# EAGLE board source_eagle (EAGLE 9.6.2)
REV: B
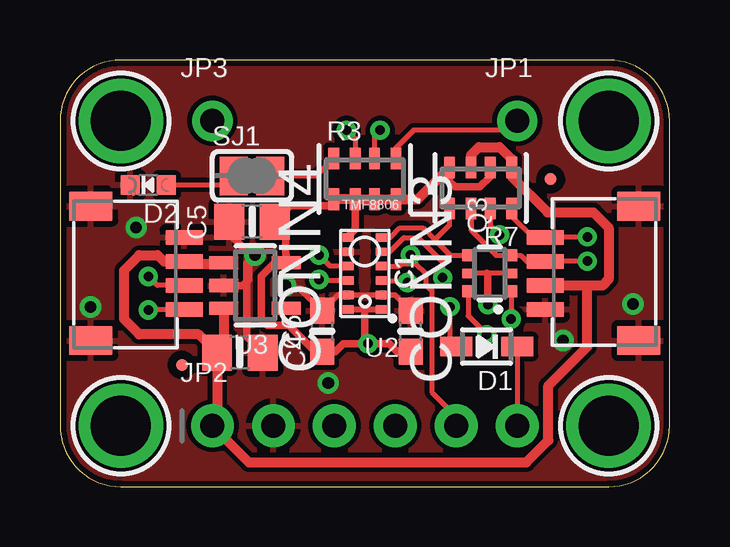
[diagram p0: board, top side]
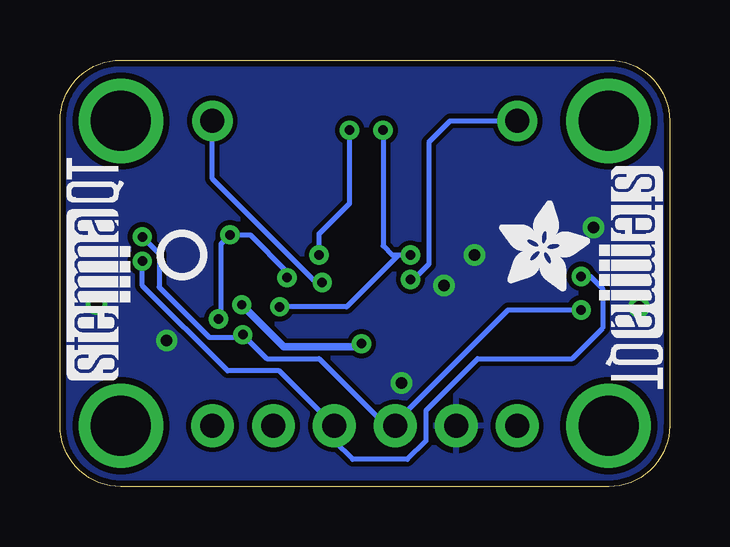
[diagram p1: board, bottom side, seen from below]

Size 25.4 x 17.78 mm. Coordinates in mm from the lower left corner, seen from the top.
Outline: 0,15.24 0,2.54 arc90 2.54,0 22.86,0 arc90 25.4,2.54 25.4,15.24 arc90 22.86,17.78 2.54,17.78 arc90 0,15.24
Copper layers (1*16): Top 0.035mm / dielectric 1.5mm / Bottom 0.035mm
Design rules "adafruit *": minimum track width 8mil, minimum drill 15.5mil, track to track 8mil, track to pad 8mil, pad to pad 8mil, via to via 8mil, smd to smd 8mil, copper to edge 10mil, drill to drill 8mil, minimum pad ring 10mil, minimum via ring 8mil, stop-mask expansion 2mil, vias tented up to drill 20mil, thermal gap 10mil
Net classes: 1 highpower: width 0.406 mm, drill 0.483 mm; 2 lowpower: width 0.305 mm, drill 0.483 mm

## Footprints (pad centres in the part's own frame; a part is rotated, then mirrored left to right if it is on the bottom)
0603-NO = smd 1.075 x 1: 1 -0.85,0; 2 0.85,0
0805-NO = smd 1.24 x 1.5: 1 -0.95,0; 2 0.95,0
JST_SH4 = smd 0.6 x 1.55: 1 -1.5,2.006; 2 -0.5,2.006; 3 0.5,2.006; 4 1.5,2.006 | smd 1.2 x 1.8: MT1 -2.8,-1.894; MT2 2.8,-1.894
SOD-323 = smd 1.35 x 0.8: A 1.27,0; C -1.27,0
CHIPLED_0603_NOOUTLINE = smd 0.8 x 0.8: A 0,-0.75; C 0,0.75
FIDUCIAL_0.5MM = smd 0.5 x 0.5: 1 0,0
1X01_ROUND = drill 1 pad 1.676: 1 0,0
1X06_ROUND_70 = drill 1 pad 1.778: 1 -6.35,0; 2 -3.81,0; 3 -1.27,0; 4 1.27,0; 5 3.81,0; 6 6.35,0
SOT363 = smd 0.5 x 0.5: 1 -0.75,-0.9; 3 0.75,-0.9; 4 0.75,0.9; 6 -0.75,0.9 | smd 0.4 x 0.5: 2 0,-0.9; 5 0,0.9
RESPACK_4X0603 = smd 0.45 x 0.9: 1 -1.3,-0.85; 2 -0.4,-0.85; 3 0.4,-0.85; 4 1.3,-0.85; 5 1.3,0.85; 6 0.4,0.85; 7 -0.4,0.85; 8 -1.3,0.85
SOLDERJUMPER_CLOSEDWIRE = smd 1.168 x 1.6: 1 -0.762,0; 2 0.762,0 | smd 0.635 x 0.203: WIRE 0,0
TMF880X = smd 0.575 x 0.35: 1 -0.738,1.5; 2 -0.738,0.9; 3 -0.738,0.3; 4 -0.738,-0.3; 5 -0.738,-0.9; 6 -0.738,-1.5; 7 0.738,-1.5; 8 0.738,-0.9; 9 0.738,-0.3; 10 0.738,0.3; 11 0.738,0.9; 12 0.738,1.5
SOT23-5 = smd 0.55 x 1.2: 1 -0.95,-1.3; 2 0,-1.3; 3 0.95,-1.3; 4 0.95,1.3; 5 -0.95,1.3
MOUNTINGHOLE_2.5_PLATED = drill 2.5 pad 3.2: P$1 0,0

## Placement (x,y rotation side)
C1  0.1uF  [0603-NO]  14.61,6.48 90 top
C4  10uF  [0805-NO]  7.49,5.59 0 top
C5  10uF  [0805-NO]  8,11.05 180 top
C6  0.1uF  [0603-NO]  10.92,6.48 90 top
CONN3  STEMMA_I2C_QT  [JST_SH4]  22.23,8.89 90 top
CONN4  STEMMA_I2C_QT  [JST_SH4]  3.17,8.89 270 top
D1  1N4148  [SOD-323]  17.78,5.84 180 top
D2  GREEN  [CHIPLED_0603_NOOUTLINE]  3.68,12.57 90 top
FID1  FIDUCIAL_0.5MM  [FIDUCIAL_0.5MM]  5.08,5.08 0 top
FID4  FIDUCIAL_0.5MM  [FIDUCIAL_0.5MM]  20.45,12.83 0 top
JP1  [1X01_ROUND]  19.05,15.24 0 top
JP2  [1X06_ROUND_70]  12.7,2.54 0 top
JP3  [1X01_ROUND]  6.35,15.24 0 top
PLABEL0  [PLABEL0]  6.35,0.89 0 top
PLABEL1  [PLABEL1]  8.89,4.19 0 top
PLABEL2  [PLABEL2]  11.43,0.89 0 top
PLABEL3  [PLABEL3]  13.97,4.19 0 top
PLABEL4  [PLABEL4]  16.64,0.89 0 top
PLABEL5  [PLABEL5]  19.05,4.19 0 top
PLABEL6  [PLABEL6]  12.57,16.64 0 top
PLABEL7  [PLABEL7]  12.57,14.99 0 top
PLABEL8  [PLABEL8]  0.38,12.45 0 top
PLABEL9  [PLABEL9]  6.35,16.89 0 top
PLABEL10  [PLABEL10]  19.18,16.89 0 top
PLABEL11  [PLABEL11]  12.7,16.26 0 bottom
PLABEL12  [PLABEL12]  12.7,12.32 0 bottom
PLABEL13  [PLABEL13]  12.7,6.86 0 bottom
PLABEL14  [PLABEL14]  12.7,1.02 0 bottom
Q3  BSS138  [SOT363]  17.91,8.89 90 top
R3  10K Pack  [RESPACK_4X0603]  12.7,12.83 0 top
R7  10K Pack  [RESPACK_4X0603]  17.53,12.45 180 top
SJ1  [SOLDERJUMPER_CLOSEDWIRE]  8,12.95 0 top
U2  TMF8806  [TMF880X]  12.7,8.89 180 top
U3  AP2112K-3.3  [SOT23-5]  8.13,8.38 270 top
U$30  MOUNTINGHOLE2.5  [MOUNTINGHOLE_2.5_PLATED]  2.54,15.24 0 top
U$31  MOUNTINGHOLE2.5  [MOUNTINGHOLE_2.5_PLATED]  22.86,15.24 0 top
U$33  MOUNTINGHOLE2.5  [MOUNTINGHOLE_2.5_PLATED]  2.54,2.54 0 top
U$34  MOUNTINGHOLE2.5  [MOUNTINGHOLE_2.5_PLATED]  22.86,2.54 0 top
U$36  [ADAFRUIT_3.5MM]  7.11,8.13 0 bottom
U$37  [PCBFEAT-REV-040]  20.32,9.65 0 bottom
U$38  [STEMMAQT]  22.48,4.45 90 bottom
U$39  [STEMMAQT]  2.92,13.34 270 bottom

## Library data of the parts
C1 C4-C6 D1 FID1 FID4 JP1-JP3 R3 R7 SJ1 U$36 U$37 = microbuilder
CONN3 CONN4 = adafruit_electromech; LCSC: C2845363
D2 = microbuilder; ROT: 270
PLABEL0 PLABEL1-PLABEL14 = pinguin
Q3 = microbuilder; JLC_ROTATION: 270
U2 = adafruit_sensor
U3 = adafruit_power; JLC_ROTATION: 0
U$30 U$31 U$33 U$34 = adafruit_electromech; BOM: EXCLUDE
U$38 U$39 = silks

## Nets
3.3V: C1.1 C5.1 C6.1 Q3.2 Q3.5 R3.1 R3.2 R3.3 R3.4 R7.2 R7.4 U2.1 U2.7 U2.12 U3.5
EN: D1.C JP2.6
EN_3V: D1.A R3.7 U2.9
GND: C1.2 C4.2 C5.2 C6.2 CONN3.1 CONN3.MT1 CONN3.MT2 CONN4.1 CONN4.MT1 CONN4.MT2 D2.C JP2.2 U2.2 U2.8 U2.11 U3.2
GPIO0: JP1.1 R3.5 U2.3
GPIO1: JP3.1 U2.10
INT: JP2.5 R3.6 U2.4
N$1: R3.8 SJ1.2
N$2: D2.A SJ1.1
SCL: CONN3.4 CONN4.4 JP2.3 Q3.6 R7.8
SCL_3V: Q3.1 R7.7 U2.5
SDA: CONN3.3 CONN4.3 JP2.4 Q3.3 R7.6
SDA_3V: Q3.4 R7.5 U2.6
VCC [highpower]: C4.1 CONN3.2 CONN4.2 JP2.1 R7.1 R7.3 U3.1 U3.3

## Tracks (layer width: path | path; a pad name or v marks a point on that pad's centre or on a via)
3.3V  (via drill 0.39)
  Top 0.203: Q3.2 17.78,8.89 Q3.5
  Top 0.254: 11.47,5.63 C6.1 | U2.12 12.7,7.39 U2.1 | 14.06,5.63 C1.1
  Top 0.305: C6.1 10.63,5.63 9.53,6.73 8.64,6.73 8.38,6.99 8.38,8.76 8.95,9.33 U3.5 9.43,9.65 9.4,9.68 9.4,10.6 C5.1 9.6,11.7 11.26,11.7 11.4,11.84 R3.1 | R7.2 17.93,12.92 17.5,12.49 16.47,12.49 16.23,12.73 16.23,12.95 R7.4 | 17.78,8.89 17.83,8.84 v17.83,7.58 | v12.84,5.96 11.8,5.96 11.47,5.63 | U2.7 12.3,10.73 R3.2 | v12.84,5.96 12.7,6.1 12.7,7.39 | v12.84,5.96 13.73,5.96 14.06,5.63
  Top 0.406: R3.1 R3.2 R3.3 R3.4 14.9,11.98 15.88,12.95 16.23,12.95
  Bottom 0.305: v17.83,7.58 16.09,5.84 12.95,5.84 v12.84,5.96
EN
  Top 0.203: D1.C JP2.6
EN_3V  (via drill 0.39)
  Top 0.203: v11.94,14.86 12.3,14.5 R3.7 | v16.25,7.49 16.25,6.1 D1.A | U2.9 11.26,9.19 v10.79,9.65
  Bottom 0.203: v11.94,14.86 11.94,10.03 11.56,9.65 v10.79,9.65 11.3,9.65 13.46,7.49 v16.25,7.49
GND  (via drill 0.48)
  Top 0.203: 11.01,7.41 11.59,7.99 U2.11 U2.2 13.94,7.99 C1.2
  Top 0.254: 11.01,7.41 C6.2 9.99,8.26 9.53,8.26 v9.4,8.38 | 7.05,10.54 C5.2
  Top 0.305: 7.05,10.54 7.88,9.71 7.88,9.24 7.87,9.23 7.87,8.64 7.62,8.38 U3.2 | C4.2 7.78,6.25 7.78,9.31 v8.13,9.65
  other vias: 11.18,4.32 20.95,6.1 23.88,7.62 3.17,10.79 1.27,7.49
  pour Top: 0,17.78 25.4,17.78 25.4,0 0,0
  pour Bottom: 0,17.78 25.4,17.78 25.4,0 0,0
GPIO0  (via drill 0.39)
  Top 0.203: v14.48,8.51 14.45,8.48 14.34,8.59 U2.3 | R3.5 14,14.13 14.73,14.86 18.67,14.86 JP1.1
  Bottom 0.203: JP1.1 19.05,12.83 14.73,8.51 v14.48,8.51
GPIO1  (via drill 0.39)
  Top 0.203: U2.10 10.84,8.59 v10.79,8.64
  Bottom 0.203: v10.79,8.64 10.67,8.64 10.03,9.27 10.03,14.35 9.14,15.24 JP3.1
INT  (via drill 0.39)
  Top 0.203: v14.61,9.65 14.25,9.3 | v13.34,14.86 13.1,14.62 R3.6 | 14.25,9.3 14.83,9.3 15.24,8.89 15.24,8.42 15.49,8.17 15.49,3.94 16.51,2.92 JP2.5 | U2.4 14.14,9.19 14.25,9.3
  Bottom 0.203: v14.61,9.65 14.61,10.54 13.34,11.81 v13.34,14.86
N$1
  Top 0.203: SJ1.2 10.68,12.95 R3.8
N$2
  Top 0.203: D2.A 6.86,12.57 SJ1.1
SCL  (via drill 0.39)
  Top 0.203: R7.8 18.83,11.27 19.71,10.39 CONN3.4 20.24,10.41 v21.97,10.41 | Q3.6 17.01,7.12 v17.78,6.35 v17.78,6.34 | v3.68,7.37 3.71,7.39 CONN4.4
  Bottom 0.203: v21.97,10.41 21.27,9.71 21.27,8.31 19.18,6.22 17.89,6.22 v17.78,6.34 16.78,5.33 14.61,5.33 11.81,2.54 JP2.3 11.43,2.67 6.73,7.37 v3.68,7.37
SCL_3V  (via drill 0.39)
  Top 0.203: R7.7 17.93,10.88 v18.32,10.49 | Q3.1 18.8,8.13 v18.8,6.99 | v15.95,8.71 15.95,9.35 14.92,10.37 14.33,10.37 13.75,9.79 U2.5
  Bottom 0.203: v18.8,6.99 18.7,7.08 18.7,10.11 v18.32,10.49 17.47,10.49 15.95,8.97 v15.95,8.71
SDA  (via drill 0.39)
  Top 0.203: R7.6 17.13,10.69 18.17,9.64 Q3.3 19.19,9.64 19.44,9.39 CONN3.3 v21.96,9.39 v21.97,9.4 | CONN4.3 4.06,8.39 v3.68,8.76
  Bottom 0.203: v21.97,9.4 21.97,8.38 18.41,4.83 16.26,4.83 JP2.4 13.97,1.91 13.21,1.14 10.92,1.14 10.16,1.91 10.16,3.17 8,5.33 4.06,5.33 2.79,6.6 2.79,8.26 3.3,8.76 v3.68,8.76
SDA_3V
  Top 0.203: Q3.4 16.27,9.64 15.62,10.29 | R7.5 16.23,10.89 15.62,10.29 | U2.6 13.77,10.39 14.16,10.78 15.13,10.78 15.62,10.29
VCC
  Top 0.406: U3.1 6.77,9.27 5.3,9.27 CONN4.2 4.33,9.39 4.06,9.65 3.3,9.65 2.67,9.02 2.67,6.99 3.3,6.35 5.78,6.35 C4.1 | U3.3 6.83,5.87 C4.1 | C4.1 6.54,2.73 JP2.1 7.87,1.02 19.43,1.02 20.34,1.93 20.34,4.22 21.97,5.84 21.97,8.38 | 21.97,8.38 22.61,8.38 22.86,8.64 22.86,10.79 22.23,11.43 20.32,11.43 18.83,12.92 R7.1 18.83,13.65 18.32,14.15 17.45,14.15 17.13,13.82 R7.3 | 21.97,8.38 CONN3.2

## Text on the board
Pinguin_tBackup: IO1 | TMF8806 | IO0 | VCEL dToF | on | GND | SDA | EN | VIN | SCL | INT
Pinguin_bBackup: TMF8806 | Time-of-Flight / SPAD Sensor | 5 Meter Range / (10m with update) / I2C addr: 0x29 / GPIO0/1 are 3V only! | VLogic/Vcc: 3-5VDC